# Altium PCB Push_counter.PcbDoc
Units mm, origin at the board's own origin, x right, y up, seen from the top; angles counter-clockwise.
Board outline 140 x 75 mm, 2 copper layers (Top Layer, Bottom Layer); 64 components, 50 nets, 229 pads, 103 vias.
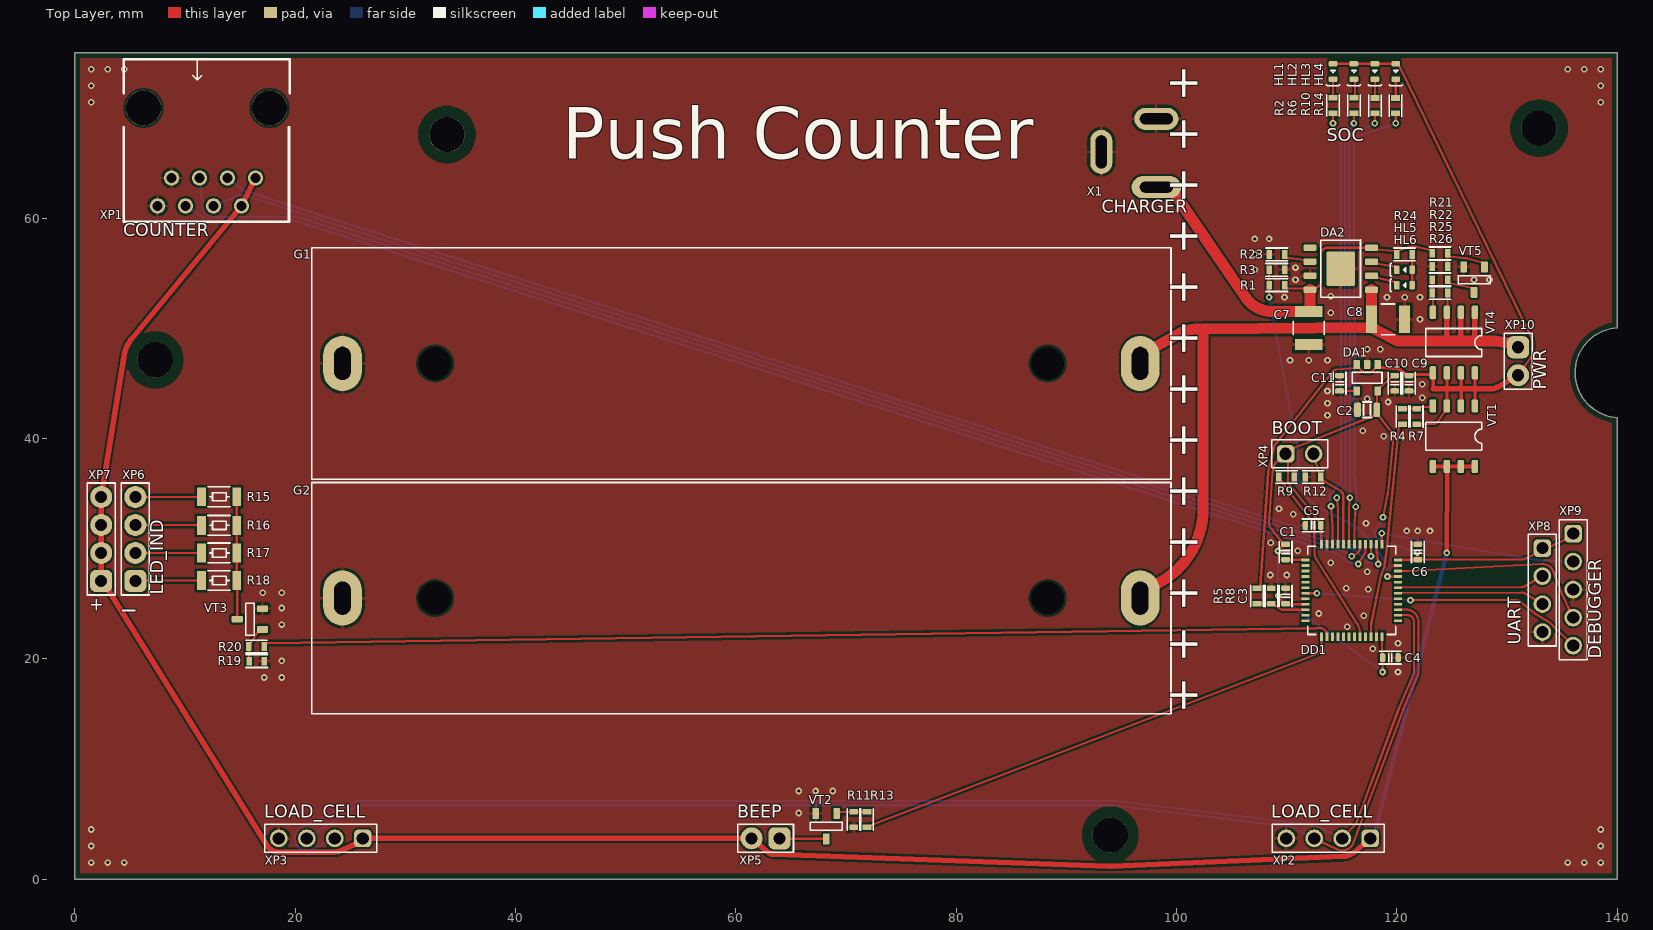
[diagram p0: Top Layer view]
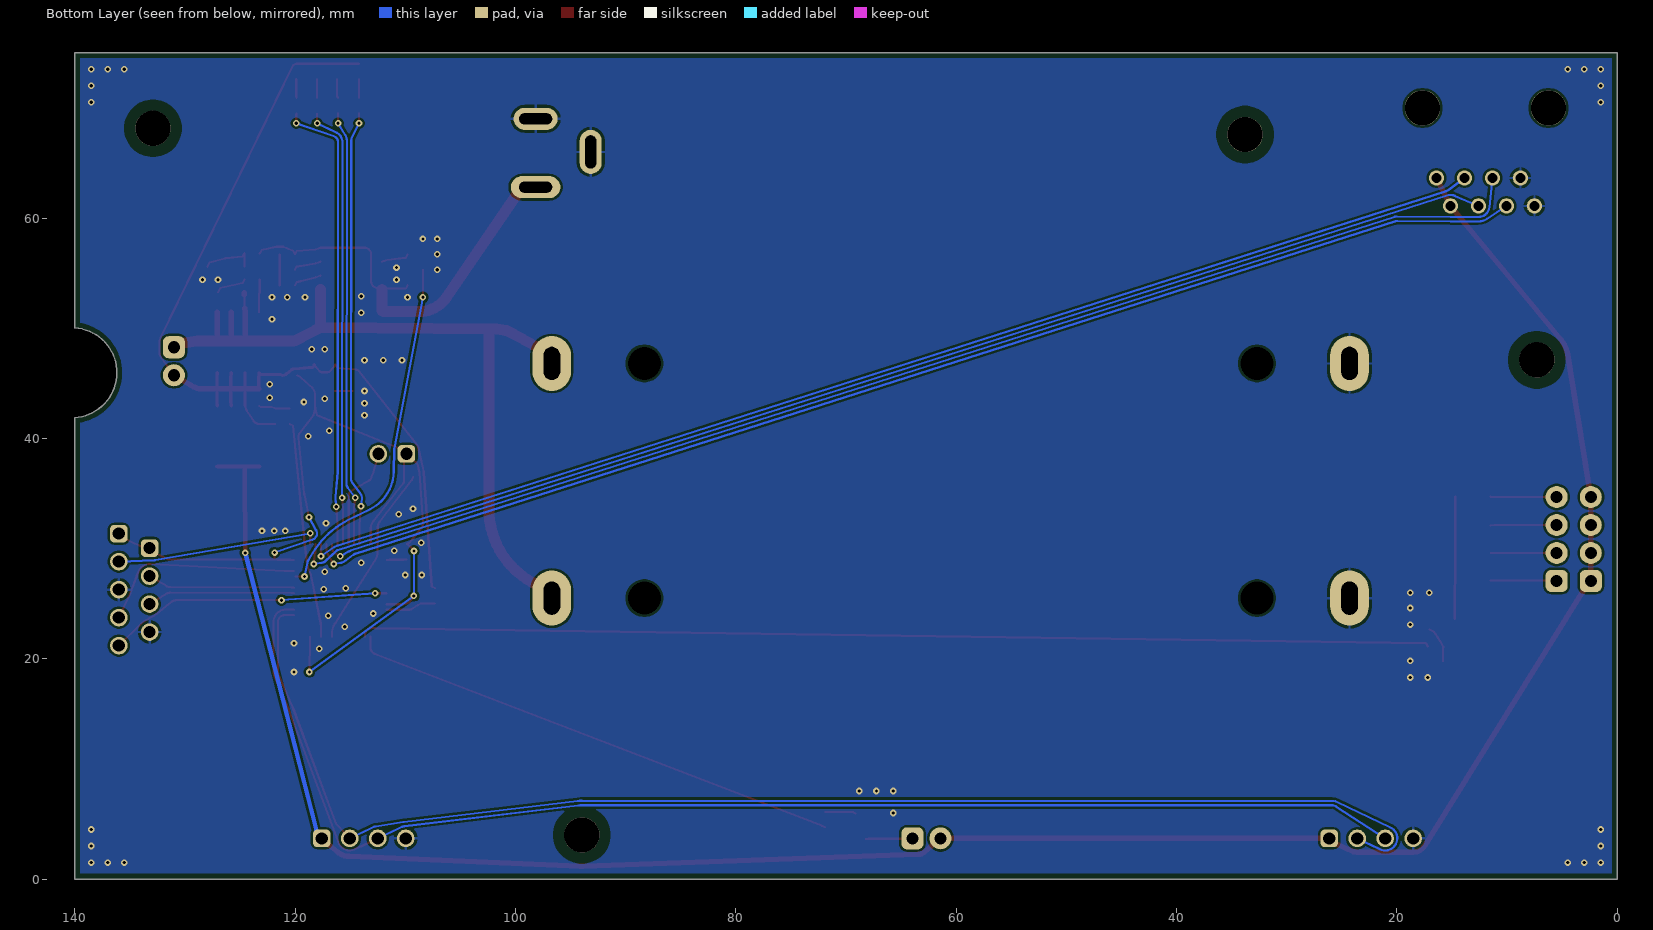
[diagram p1: Bottom Layer view, seen from below]

## Layer stack, top to bottom
Top Solder: solder mask 0.0102, Solder Resist, Dk 3.5
Top Layer: signal copper 0.0356
Dielectric 1: dielectric 0.32, FR-4, Dk 4.8
Bottom Layer: signal copper 0.0356
Bottom Solder: solder mask 0.0102, Solder Resist, Dk 3.5

## Board outline
0,0 140,0 140,41.881 cw(c140.362,46.323) 139.032,42.069 cw(c140.249,45.959) 138.973,49.831 cw(c140.371,45.59) 140,50.04 140,75 0,75

## Design rules (kind name [scope] priority, off if disabled: settings)
AssemblyTestpoint [All] p1: testpointundercomponent=TRUE minsize=1.016 maxsize=2.54 preferedsize=1.524 minholesize=0 maxholesize=1.016 preferedholesize=0.813 testpointgrid=0.025 usegrid=TRUE gridoriginx=0 gridoriginy=-75 gridtolerance=0 allowsidetop=TRUE allowsidebottom=TRUE
BoardOutlineClearance [All] p1: gap=0.5 ignorepadtopadclearanceinfootprint=FALSE
Clearance Clearance_1 [(ObjectKind = 'Pad') And (Name = 'Free-MH')] p1: gap=1 ignorepadtopadclearanceinfootprint=FALSE
Clearance [All] p2: gap=0.2 ignorepadtopadclearanceinfootprint=FALSE
FabricationTestpoint [All] p1: side=3 testpointundercomponent=TRUE minsize=1.016 maxsize=2.54 preferedsize=1.524 minholesize=0 maxholesize=1.016 preferedholesize=0.813 testpointgrid=0.025 allowsidetop=TRUE allowsidebottom=TRUE usegrid=TRUE gridoriginx=0 gridoriginy=-75 gridtolerance=0
PolygonConnect PolygonConnect_1 [IsVia] p1: connectstyle=Direct reliefconductorwidth=0.254 reliefentries=4 polygonreliefangle="90 Angle" airgapwidth=0.254
PolygonConnect [All] p2: connectstyle=Relief reliefconductorwidth=0.254 reliefentries=4 polygonreliefangle="90 Angle" airgapwidth=0.254
RoutingVias [All] p1: holewidth=0.3 width=0.6 viastyle="Through Hole" minholewidth=0.3 minwidth=0.6 maxholewidth=0.3 maxwidth=0.6
SolderMaskExpansion SolderMaskExpansion_1 [IsVia] p1: expansion=0.1 istentingtop=TRUE
SolderMaskExpansion [All] p2: expansion=0.102 istentingtop=FALSE
Width [All] p1: maxlimit=1.5 minlimit=0.2 preferedwidth=0.254 minimp=50.000000 maximp=50.000000 favimp=50.000000
27 further rules are at their usual default settings.

## Components (designator, comment, footprint, x,y, rotation, side; value= is the part's Value field where it differs from the comment)
C1 "0,1uF" C0603C 109.9,29.7 r270 top value=0,1
C2 "4.7uF" C0805C 117.3,42.6 r180 top value=4,7
C3 "0,1uF" C0603C 109.9,25.7 r90 top value=0,1
C4 "0,1uF" C0603C 119.4,20.1 r0 top value=0,1
C5 "0,1uF" C0603C 112.4,32.1 r180 top value=0,1
C6 "0,1uF" C0603C 121.9,29.7 r90 top value=0,1
C7 "10uF" C1210C 112,50 r90 top value=10
C8 "10uF" C1210C 119.2,50.8 r180 top value=10
C9 "1.0uF" C0603C 121.1,45 r270 top value=1,0
C10 "1.0uF" C0603C 119.8,45 r270 top value=1,0
C11 "0,01uF" C0603C 114.8,45 r90 top value=0,01
DA1 "LD3985M33R" SOT23-5 117.3,45.5 r270 top
DA2 "TP4056" SO-8-EP 114.9,55.4 r0 top
DD1 "STM32F103C8T6" LQFP48 115.9,26.2 r0 top
G1 "KLS5-18650-L" KLS5-18650-L 60.5,46.8 r0 top
G2 "KLS5-18650-L" KLS5-18650-L 60.5,25.5 r0 top
HL1 "FYLS-0603URC" LED0603 114.2,73.3 r270 top
HL2 "FYLS-0603URC" LED0603 116.1,73.3 r270 top
HL3 "FYLS-0603URC" LED0603 118,73.3 r270 top
HL4 "FYLS-0603URC" LED0603 119.9,73.3 r270 top
HL5 "FYLS-0603UGC" LED0603 120.7,55.3 r180 top
HL6 "FYLS-0603UGC" LED0603 120.7,53.9 r180 top
R1 "6,04k" C0603R 109.1,53.9 r180 top
R2 "1k" C0603R 114.197,70.212 r270 top
R3 "10k" C0603R 109.1,55.3 r180 top
R4 "100R" C0603R 120.5,42 r90 top
R5 "4,02k" C0603R 107.3,25.7 r270 top
R6 "1k" C0603R 116.107,70.211 r270 top
R7 "10k" C0603R 121.8,42 r90 top
R8 "10k" C0603R 108.6,25.7 r270 top
R9 "10k" C0603R 109.97,36.5 r180 top
R10 "1k" C0603R 118.01,70.192 r270 top
R11 "10k" C0603R 70.7,5.4 r90 top
R12 "10k" C0603R 112.37,36.5 r0 top
R13 "100R" C0603R 71.9,5.4 r90 top
R14 "1k" C0603R 119.875,70.192 r270 top
R15 "36R" C1206R 13.1,34.7 r180 top
R16 "36R" C1206R 13.1,32.1 r180 top
R17 "36R" C1206R 13.1,29.6 r180 top
R18 "36R" C1206R 13.1,27.1 r180 top
R19 "10k" C0603R 16.519,19.774 r180 top
R20 "100R" C0603R 16.5,21.1 r180 top
R21 "100R" C0603R 123.9,56.8 r0 top
R22 "10k" C0603R 123.9,55.6 r180 top
R23 "1,2k" C0603R 109.1,56.7 r180 top
R24 "2k" C0603R 120.7,56.7 r0 top
R25 "100R" C0603R 123.9,54.4 r0 top
R26 "10k" C0603R 123.9,53.2 r180 top
VT1 "IRF7240TRPBF" SO-8-SINGLE-FET 125.2,40.2 r270 top
VT2 "AO3400A" SOT23-3-FET 68.2,4.8 r270 top
VT3 "AO3400A" SOT23-3-FET 15.9,23.6 r180 top
VT4 "IRF7240TRPBF" SO-8-SINGLE-FET 125.2,48.7 r270 top
VT5 "AO3400A" SOT23-3-FET 127,54.4 r270 top
X1 "KLD-0202" KLD-0202 98.171,76.499 r270 top
XP1 "54602-908LF" 54602-908LF 13.656,73.494 r0 top locked
XP2 "PLS-4" PLS-4#1 113.77,3.7 r180 top
XP3 "PLS-4" PLS-4#1 22.33,3.7 r180 top
XP4 "PLS-2" PLS-2#1 111.17,38.6 r0 top
XP5 "PLS-2" PLS-2#2 62.7,3.7 r180 top
XP6 "PLS-4" PLS-4#2 5.5,30.87 r90 top
XP7 "PLS-4" PLS-4#2 2.4,30.87 r90 top
XP8 "PLS-4" PLS-4#1 133.2,26.23 r270 top
XP9 "PLS-5" PLS-5 136,26.27 r270 top
XP10 "PLS-2" PLS-2#2 131,47 r270 top

## Footprints (in the part's own frame and the unit in brackets; to place one, negate y for a bottom-side part, rotate by r counter-clockwise, add the part's x,y. Pads: shape width x height; smd on the part's side, far side on the other; paste and mask are expansions set on the pad)
54602-908LF [mm]
  round 1.4 hole 0.9: 1(2.75,-9.86) 2(1.48,-12.4) 3(0.21,-9.86) 4(-1.06,-12.4) 5(-2.33,-9.86) 6(-3.6,-12.4) 7(-4.87,-9.86) 8(-6.14,-12.4)
  round 3.2 hole 3.2 unplated: 15(-7.41,-3.51) 15(4.02,-3.51)
  silkscreen extent -9.2,-13.84 5.85,0.92
C0603C [mm]
  rrect50% 0.5x0.8 smd: 1(-0.7,0) 2(0.7,0)
  silkscreen extent -0.97,-0.58 0.97,0.58, body extent -0.8,-0.4 0.8,0.4, height 0.5
C0603R [mm]
  rect 0.5x0.8 smd: 1(-0.7,0) 2(0.7,0)
  silkscreen extent -0.97,-0.58 0.97,0.58, body extent -0.7,-0.41 0.7,0.41, height 0.45
C0805C [mm]
  rrect50% 0.6x1.3 smd: 1(-0.875,0) 2(0.875,0)
  silkscreen extent -0.4,-0.7 0.4,0.7, body extent -1,-0.6 1,0.6, height 0.8
C1206R [mm]
  rect 0.8x1.7 smd: 1(-1.6,0) 2(1.6,0)
  silkscreen extent -1,-0.9 1,0.9, body extent -1.7,-0.8 1.7,0.8, height 0.8
C1210C [mm] "Chip Capacitor, 2-Leads, Body 3,2x2,5mm, IPC Medium Density"
  rect 1x2.5 smd: 1(1.5,0) 2(-1.5,0)
  silkscreen extent -0.6,-1.4 0.6,1.4, body extent -2,-1.3 2,1.3, height 1.6
KLD-0202 [mm] "DC Power Jack, 2.5mm, KLD Series, PCB Mount"
  oval 2x4.5 hole 1 slot 3 at 90 deg: 1(13.7,0)
  oval 2x4 hole 1 slot 3 at 90 deg: 2(7.5,0)
  oval 4x2 hole 1 slot 3 at 0 deg: 3(10.5,-5)
  body extent 0.19,-4.92 14.82,4.48, height 11
KLS5-18650-L [mm]
  oval 3.5x5 hole 3 slot 1.5 at 0 deg: 1(-36.2,0) 2(36.2,0)
  round 0 hole 3 unplated: TH(-27.8,0) TH(27.8,0)
  silkscreen extent -39,-10.5 39,10.5, body extent -38.83,-10.4 38.82,10.4, height 21.65
LED0603 [mm]
  rrect50% 0.5x0.8 smd: 1(-0.7,0) 2(0.7,0)
  Top Layer pour cut-out: -0.456,0.5 0.45,0.5 0.45,-0.5 -0.456,-0.5
  silkscreen extent -0.1,-0.6 1.3,0.6, body extent -0.8,-0.4 0.8,0.4, height 0.8
LQFP48 [mm]
  rect 0.75x0.254 smd: 1(-4.2,2.75) 2(-4.2,2.25) 3(-4.2,1.75) 4(-4.2,1.25) 5(-4.2,0.75) 6(-4.2,0.25) 7(-4.2,-0.25) 8(-4.2,-0.75) 9(-4.2,-1.25) 10(-4.2,-1.75) 11(-4.2,-2.25) 12(-4.2,-2.75) 25(4.2,-2.75) 26(4.2,-2.25) 27(4.2,-1.75) 28(4.2,-1.25) 29(4.2,-0.75) 30(4.2,-0.25) 31(4.2,0.25) 32(4.2,0.75) 33(4.2,1.25) 34(4.2,1.75) 35(4.2,2.25) 36(4.2,2.75)
  rect 0.254x0.75 smd: 13(-2.75,-4.2) 14(-2.25,-4.2) 15(-1.75,-4.2) 16(-1.25,-4.2) 17(-0.75,-4.2) 18(-0.25,-4.2) 19(0.25,-4.2) 20(0.75,-4.2) 21(1.25,-4.2) 22(1.75,-4.2) 23(2.25,-4.2) 24(2.75,-4.2) 37(2.75,4.2) 38(2.25,4.2) 39(1.75,4.2) 40(1.25,4.2) 41(0.75,4.2) 42(0.25,4.2) 43(-0.25,4.2) 44(-0.75,4.2) 45(-1.25,4.2) 46(-1.75,4.2) 47(-2.25,4.2) 48(-2.75,4.2)
  silkscreen extent -4,-4 4,4, body extent -4.5,-4.51 4.5,4.49, height 1.56
PLS-2#1 [mm]
  rrect50% 1.6x1.6 hole 1.1: 1(-1.27,0)
  round 1.6 hole 1.1: 2(1.27,0)
  silkscreen extent -2.54,-1.27 2.54,1.27, body extent -2.54,-1.27 2.54,1.27, height 8.5
PLS-2#2 [mm]
  rrect50% 2x2 hole 1.1: 1(-1.27,0)
  round 2 hole 1.1: 2(1.27,0)
  silkscreen extent -2.54,-1.27 2.54,1.27, body extent -2.54,-1.27 2.54,1.27, height 8.5
PLS-4#1 [mm]
  rrect50% 1.6x1.6 hole 1.1: 1(-3.81,0)
  round 1.6 hole 1.1: 2(-1.27,0) 3(1.27,0) 4(3.81,0)
  silkscreen extent -5.08,-1.27 5.08,1.27, body extent -5.08,-1.27 5.08,1.27, height 8.5
PLS-4#2 [mm]
  rrect50% 2x2 hole 1.1: 1(-3.81,0)
  round 2 hole 1.1: 2(-1.27,0) 3(1.27,0) 4(3.81,0)
  silkscreen extent -5.08,-1.27 5.08,1.27, body extent -5.08,-1.27 5.08,1.27, height 8.5
PLS-5 [mm]
  rrect50% 1.6x1.6 hole 1.1: 1(-5.08,0)
  round 1.6 hole 1.1: 2(-2.54,0) 3(0,0) 4(2.54,0) 5(5.08,0)
  silkscreen extent -6.35,-1.27 6.35,1.27, body extent -6.35,-1.27 6.35,1.27, height 8.5
SO-8-EP [mm]
  rrect50% 1.2x0.6 smd: 1(-2.794,1.905) 2(-2.794,0.635) 3(-2.794,-0.635) 4(-2.794,-1.905) 5(2.794,-1.905) 6(2.794,-0.635) 7(2.794,0.635) 8(2.794,1.905)
  rrect10% 2.6x3.1 smd: EP(0,0)
  silkscreen extent -1.8,-2.6 1.8,2.6, body extent -3.07,-2.44 3.07,2.45, height 1.76
SO-8-SINGLE-FET [mm]
  rrect50% 1.2x0.6 smd: D(2.75,1.878) D(2.75,-0.662) D(2.75,0.608) D(2.75,-1.932) G(-2.75,-1.932) S(-2.75,1.878) S(-2.75,-0.662) S(-2.75,0.608)
  silkscreen extent -1.27,-2.57 1.27,2.51, body extent -3.07,-2.47 3.07,2.42, height 1.76
SOT23-3-FET [mm] "SOT23, 3 pin"
  rrect25% 1x0.6 smd: D(1.15,0) G(-1.15,0.95) S(-1.15,-0.95)
  silkscreen extent -0.38,-1.45 0.38,1.45, body extent -1.4,-1.45 1.4,1.45, height 1.29
SOT23-5 [mm]
  rrect25% 0.8x0.6 smd: 1(-1.2,0.95) 2(-1.2,0) 3(-1.2,-0.95) 4(1.2,-0.95) 5(1.2,0.95)
  silkscreen extent -0.51,-1.35 0.51,1.35, body extent -1.4,-1.45 1.4,1.45, height 1.44

## Part data
C1 C3 C4 C5 C6: library part C0603C104K5RACAUTO, "C0603C104K5RACAUTO, 0603 X7R  0,1 uF 50V", Dielectric=X7R, Manufacturer=KEMET, Package="SMD 0603", Tolerance=±10%, Voltage=50V, Component Note="0603 0,1uF ±10% 50V X7R", ComponentLink1Description=Datasheet, Part Number=C0603C104K5RACAUTO, Tmax=125, Tmin=-55, Units=uF
C2: library part CL21B475KOFNFNE, "CL21B475KOFNFNE, 0805 X7R 4,7 uF 16V", Dielectric=X7R, Manufacturer=Samsung, Package="SMD 0805", Tolerance=±10%, Voltage=16V, Component Note="0805 4,7uF ±10% 16V X7R", ComponentLink1Description=Datasheet, ComponentLink1URL=https://media.digikey.com/pdf/Data%20Sheets/Samsung%20PDFs/CL_Series_MLCC_ds.pdf, Part Number=CL21B475KOFNFNE, Tmax=125, Tmin=-55, Units=uF
C7 C8: library part C3225X7R1H106M250AC, "C3225X7R1H106M250AC, 1210 X7R 10 uF 50V", Dielectric=X7R, Manufacturer=TDK, Package="SMD 1210", Tolerance=±20%, Voltage=50V, Component Note="1210 10uF ±20% 50V X7R", ComponentLink1Description=Datasheet, ComponentLink1URL=https://ru.mouser.com/datasheet/2/400/lcc_commercial_general_en-837201.pdf, Part Number=C3225X7R1H106M250AC, Tmax=125, Tmin=-55, Units=uF
C9 C10: library part CL10B105KA8NNNC, "CL10B105KA8NNNC, 0603 X7R 1,0 uF 25V", Dielectric=X7R, Manufacturer=Samsung, Package="SMD 0603", Tolerance=±10%, Voltage=25V, Component Note="0603 1,0uF ±10% 25V X7R", ComponentLink1Description=Datasheet, ComponentLink1URL=https://media.digikey.com/pdf/Data%20Sheets/Samsung%20PDFs/CL_Series_MLCC_ds.pdf, Part Number=CL10B105KA8NNNC, Tmax=125, Tmin=-55, Units=uF
C11: library part CL10B103KC8NNNC, "CL10B103KC8NNNC, 0603 X7R 0,01 uF 100V", Dielectric=X7R, Manufacturer=Samsung, Package="SMD 0603", Tolerance=±10%, Voltage=100V, Component Note="0603 0,01uF ±10% 100V X7R", ComponentLink1Description=Datasheet, Part Number=CL10B103KC8NNNC, Tmax=125, Tmin=-55, Units=uF
DA1: "Linear Voltage Regulator", Manufacturer="Microchip Technology", Package=SOT23-5, BOM="DC/DC 5,5-6V, 3,3V,", ComponentLink1Description=Datasheet, ComponentLink1URL=https://www.electronshik.ru/pdf/l/ld3985.pdf, Iout=0,5, Part Number=LD3985M33R, Tmax=125, Tmin=-40, TypeConvert=DC/DC, Vin=5,5, VinMax=6, Vout=3,3
DA2: Manufacturer=UMW, Package=SO-8-EP, BOM="SLLBC 5-8V, V,", ComponentLink1Description=Datasheet, ComponentLink1URL=https://static.chipdip.ru/lib/848/DOC018848830.pdf, Iout=1, Part Number=TP4056, Tmax=125, Tmin=-40, TypeConvert=SLLBC, Vin=5, VinMax=8
DD1: "STM32F103C8T6, 64 KB Flash, 20 KB RAM, LQFP48", FREQ=72, Manufacturer=STMicroelectronics, Package=LQFP48, CAN=1, Component Note=LQFP48, ComponentLink1Description=Datasheet, Core="ARM Cortex-M3", CPU Speed="1.25 DMIPS/MHz", EEPROM=-, ETH=-, FLASH="64 KB", Part Number=STM32F103C8T6, RAM="20 KB", Tmax=125, Tmin=-40
G1 G2: "KLS5-18650-L, , BAT", ComponentLink1Description=Datasheet, Part Number=KLS5-18650-L, System=Connector, Type=BAT
HL1 HL2 HL3 HL4: "SMD 0603 Red 30mA 80mcd", Color=Red, Current=30mA, Manufacturer=Foryard, Package="SMD 0603", Voltage=2.1V, Alternative="LTST-C191KRKT Lite-On Inc", Component Note="0603, Red", ComponentLink1Description=Datasheet, ComponentLink1URL=https://sds.compel.ru/item-pdf/af7b1cc2bbe1d373f48bd8c95fbe7607/pn/foryard~fyls-0603urc.pdf, Luminous intensity=80mcd, Part Number=FYLS-0603URC
HL5 HL6: "SMD 0603 Green 30mA 65mcd", Color=Green, Current=30mA, Manufacturer=Foryard, Package="SMD 0603", Voltage=2V, Alternative="LTST-C191KGKT Lite-On Inc", Component Note="0603, Green", ComponentLink1Description=Datasheet, ComponentLink1URL=https://sds.compel.ru/item-pdf/bfcdb1ef531cd95dc93bcbdb85ab35c3/pn/foryard~fyls-0603ugc.pdf, Luminous intensity=65mcd, Part Number=FYLS-0603UGC
R1: library part RC0603FR-076K04L, "RC0603FR-076K04L, 1% 6,04k", Manufacturer=Yageo, Package="SMD 0603", Power=0,1, Tolerance=1%, Voltage=75, Component Note="0603 6,04k 1%", Part Number=RC0603FR-076K04L, ppm=100
R2 R6 R10 R14: library part RC0603JR-071KL, "RC0603JR-071KL, 5% 1k", Manufacturer=Yageo, Package="SMD 0603", Power=0,1, Tolerance=5%, Voltage=75, Component Note="0603 1k 5%", Part Number=RC0603JR-071KL, ppm=100
R3 R8: library part RC0603FR-0710KL, "RC0603FR-0710KL, 1% 10k", Manufacturer=Yageo, Package="SMD 0603", Power=0,1, Tolerance=1%, Voltage=75, Component Note="0603 10k 1%", Part Number=RC0603FR-0710KL, ppm=100
R4 R13 R20 R21 R25: library part RC0603FR-07100RL, "RC0603FR-07100RL, 1% 100R", Manufacturer=Yageo, Package="SMD 0603", Power=0,1, Tolerance=1%, Voltage=75, Component Note="0603 100R 1%", Part Number=RC0603FR-07100RL, ppm=100
R5: library part RC0603FR-074K02L, "RC0603FR-074K02L, 1% 4,02k", Manufacturer=Yageo, Package="SMD 0603", Power=0,1, Tolerance=1%, Voltage=75, Component Note="0603 4,02k 1%", Part Number=RC0603FR-074K02L, ppm=100
R7 R9 R11 R12 R19 R22 R26: library part RC0603JR-0710KL, "RC0603JR-0710KL, 5% 10k", Manufacturer=Yageo, Package="SMD 0603", Power=0,1, Tolerance=5%, Voltage=75, Component Note="0603 10k 5%", Part Number=RC0603JR-0710KL, ppm=100
R15 R16 R17 R18: library part RC1206JR-0736RL, "RC1206JR-0736RL, 5% 36R", Manufacturer=Yageo, Package="SMD 1206", Power=0,125, Tolerance=5%, Voltage=150, Component Note="1206 36R 5%", Part Number=RC1206JR-0736RL, ppm=100
R23: library part RC0603JR-071K2L, "RC0603JR-071K2L, 5% 1,2k", Manufacturer=Yageo, Package="SMD 0603", Power=0,1, Tolerance=5%, Voltage=75, Component Note="0603 1,2k 5%", Part Number=RC0603JR-071K2L, ppm=100
R24: library part RC0603JR-072KL, "RC0603JR-072KL, 5% 2k", Manufacturer=Yageo, Package="SMD 0603", Power=0,1, Tolerance=5%, Voltage=75, Component Note="0603 2k 5%", Part Number=RC0603JR-072KL, ppm=100
VT1 VT4: "IRF7240TRPBF, SO-8 A V", Manufacturer=Infineon, Package=SO-8, Component Note="SO-8, P, V, A", ComponentLink1Description=Datasheet, ComponentLink1URL=https://static.chipdip.ru/lib/404/DOC016404580.pdf, Part Number=IRF7240TRPBF, Type=P
VT2 VT3 VT5: "AO3400A, SOT23-3 5A 30V", Manufacturer=UMW, Package=SOT23-3, Component Note="SOT23-3, N, 30V, 5A", ComponentLink1Description=Datasheet, ComponentLink1URL=https://static.chipdip.ru/lib/975/DOC014975392.pdf, I Drain=5, Input Cap=1050, P=1W, Part Number=AO3400A, Qg=12, RDS=0,033, Type=N, U Drain-Source=30, U Gate max=12, U Gate th=1,4
X1: "KLD-0202, Kycon,", Manufacturer=Kycon, ComponentLink1Description=Datasheet, Part Number=KLD-0202, System=Connector
XP1: "54602-908LF, , ETH", ComponentLink1Description=Datasheet, Part Number=54602-908LF, System=Connector, Type=ETH
XP2 XP3 XP6 XP7 XP8: "PLS-4, , PLS 4 Pins", ComponentLink1Description=Datasheet, Part Number=PLS-4, Pins=4, System=Connector, Type=PLS
XP4 XP5 XP10: "PLS-2, , PLS 2 Pins", ComponentLink1Description=Datasheet, Part Number=PLS-2, Pins=2, System=Connector, Type=PLS
XP9: "PLS-5, , PLS 5 Pins", ComponentLink1Description=Datasheet, Part Number=PLS-5, Pins=5, System=Connector, Type=PLS

## Free pads (board coordinates)
  round 3.2 hole 3.2 unplated: MH(7.303,47.124) MH(33.782,67.57) MH(93.98,4.007) MH(132.905,68.142)

## Via types
v1: diameter 0.6, hole 0.3, Top Layer to Bottom Layer, tented both sides, 103 vias

## Nets (pads, with @x,y where several pads share a name; then routed paths per layer and width w, separated by ;. In a path a pad name is that pad's centre, name@x,y a point inside that pad or via, vN(x,y) a via of type N, cw(c..) or ccw(c..) an arc to the next point about the centre after c; other vN are vias at no path point)
3V3: C1.1 C2.1 C3.1 C4.1 C5.1 C6.1 C10.1 DA1.5 DD1.9 DD1.24 DD1.36 DD1.48 XP4.1 XP8.1 XP9.1 | length 88
  Top Layer w0.2: v1(109.213,29.782) 109.539,30.171 cw(c109.999,29.786) 109.75,30.332 C1.1 109.625,30.525 108.53,31.897 108.529,31.898 cw(c108.999,32.271) 108.401,32.314 108.721,36.92 cw(c109.02,36.9) 108.728,36.967 108.851,37.505 108.851,37.507 cw(c109.436,37.372) 109.055,37.836 109.5,38.2 XP4.1 ; v1(109.218,25.7) 109.625,25.125 C3.1 110.175,24.949 111.425,24.949 DD1.9 ; DD1.48 113.142,30.675 113.142,31.825 C5.1 112.975,32.375 110.184,35.914 cw(c110.42,36.1) 110.12,36.1 110.12,38.2 XP4.1 ; DD1.24 118.657,21.725 118.657,20.375 C4.1 v1(118.7,18.8) ; v1(118.737,32.841) 119.156,34.911 cw(c119.745,34.794) 119.165,34.947 119.165,34.949 ccw(c118.585,35.104) 119.182,35.044 119.689,40.07 ccw(c119.092,40.131) 119.567,40.497 119.566,40.498 118.325,42.1 C2.1 ; C10.1 119.525,45.575 118.45,44.6 DA1.5 118.197,44 118.197,43.1 C2.1 ; DD1.36 120.375,28.977 121.625,28.977 C6.1 ; v1(121.864,29.633) 121.871,29.499 cw(c121.272,29.462) 121.872,29.462 121.872,29.125 C6.1 ; XP9.1 135.6,30.95 133.288,29.854 131.61,29.058 cw(c131.353,29.6) 131.353,29 122.175,29 C6.1 ; XP4.1 110.3,39 118.025,42.1 C2.1
  Bottom Layer w0.2: v1(109.213,29.782) v1(109.218,25.7) v1(118.7,18.8) ; 118.369,30.829 cw(c118.612,31.378) 118.087,31.669 v1(118.737,32.841) ; 118.37,30.829 118.383,30.823 ; 118.383,30.823 ccw(c118.626,31.372) 118.432,30.804 v1(121.864,29.633)
5V: C7.1 DA2.4 DA2.8 R1.1 R21.1 R24.1 X1.1 | length 38.9
  Top Layer w0.2: R1.1 109.95,53.6 111.656,53.6 DA2.4 DA2.4@112.556,53.645 ; DA2.4@112.56,53.645 DA2.4@112.556,53.645 ; R21.1 123.05,57.1 121.714,57.393 ccw(c121.65,57.1) 121.651,57.4 121.15,57.4 ccw(c121.15,57.1) 121.032,57.376 120.15,57 R24.1 119.85,57 118.144,57.155 DA2.8 117.244,57.301 113.7,57.301 ccw(c113.7,56.701) 113.1,56.701 113.1,54.242 cw(c112.5,54.242) 112.562,53.646 DA2.4@112.556,53.645
  Top Layer w1: X1.1 99.421,62.799 106.257,52.806 ccw(c108.733,54.5) 108.733,51.5 C7.1 ; DA2.4 C7.1@112.106,51.562
BAT_MEAS: DD1.10 R5.2 R8.2 | length 4.5
  Top Layer w0.2: R5.2 108.3,25 R8.2 108.9,24.85 109.388,24.522 ccw(c109.625,24.875) 109.625,24.45 111.425,24.45 DD1.10
BEEP_CTRL: DD1.13 R13.1 | length 45.5
  Top Layer w0.2: R13.1 72.2,4.85 112.765,20.443 ccw(c112.55,21.003) 113.15,21.026 113.15,21.725 DD1.13
BOOT0: DD1.44 R12.2 XP4.2 | length 9.4
  Top Layer w0.2: XP4.2 112.92,36.8 R12.2 113.22,36.2 114.835,35.272 cw(c114.536,34.752) 115.136,34.752 115.136,30.675 DD1.44
BOOT1: DD1.20 R9.2 | length 16.7
  Top Layer w0.2: R9.2 109.42,36.2 112.369,32.383 ; 112.369,32.382 cw(c111.894,32.016) 112.494,32.025 112.524,29.9 112.524,29.632 ccw(c113.928,29.632) 112.529,29.508 ccw(c113.928,29.632) 112.606,29.159 112.935,28.64 113.932,27.066 114.014,26.935 116.39,23.184 cw(c115.883,22.863) 116.392,23.18 cw(c114.973,22.279) 116.654,22.269 DD1.20
CHG_DET: DD1.33 R1.2 R3.2 | length 32.6
  Top Layer w0.2: v1(108.4,52.8) 108.4,53.6 R1.2 R3.2 ; v1(119.15,27.462) 119.825,27.462 DD1.33@119.947,27.45
  Bottom Layer w0.2: v1(108.4,52.8) 110.988,39.13 cw(c110.3,39) 111,39.015 111.045,36.959 ccw(c114.922,37.042) 113.213,33.561 115.11,32.628 cw(c111.631,25.546) 118.398,29.603 118.815,28.909 cw(c118.3,28.6) 118.849,28.841 cw(c118.3,28.6) 118.887,28.722 v1(119.15,27.462)
CHG_LVL_1: DD1.42 R14.2 | length 41.7
  Top Layer w0.2: DD1.42 116.147,30.675 116.147,32.101 cw(c116.747,32.101) 116.148,32.143 v1(116.264,33.794) ; R14.2 119.9,69.342 v1(119.9,68.6)
  Bottom Layer w0.2: v1(116.264,33.794) 116.333,34.545 ccw(c115.736,34.6) 116.334,34.65 116.133,36.984 116.1,66.5 116.1,66.871 116.1,66.873 cw(c116.7,66.871) 116.506,67.439 v1(119.9,68.6)
CHG_LVL_2: DD1.43 R10.2 | length 40.4
  Top Layer w0.2: DD1.43 115.649,30.675 115.649,33.636 cw(c116.249,33.636) 115.652,33.692 v1(115.736,34.6) ; v1(118,68.6) 118,69.342 R10.2
  Bottom Layer w0.2: v1(115.736,34.6) 115.7,66.5 115.7,67.009 115.738,67.143 cw(c116.7,66.871) 115.864,67.42 cw(c116.7,66.871) 115.87,67.429 cw(c116.7,66.871) 116.159,67.712 cw(c116.7,66.871) 116.269,67.773 v1(118,68.6)
CHG_LVL_3: DD1.45 R6.2 | length 39.6
  Top Layer w0.2: v1(114.536,34.6) 114.641,33.665 cw(c114.045,33.598) 114.645,33.598 114.645,30.675 DD1.45 ; v1(116.1,68.6) 116.1,69.361 R6.2
  Bottom Layer w0.2: v1(114.536,34.6) 115.218,35.524 ccw(c114.735,35.879) 115.335,35.878 115.3,66.5 115.3,67.008 cw(c116.3,67.007) 115.446,67.528 v1(116.1,68.6)
CHG_LVL_4: DD1.46 R2.2 | length 39.6
  Top Layer w0.2: v1(114.018,33.833) 114.146,32.095 cw(c113.548,32.051) 114.148,32.051 114.148,30.675 DD1.46 ; R2.2 114.2,69.362 v1(114.2,68.6)
  Bottom Layer w0.2: v1(114.018,33.833) 113.94,34.533 cw(c114.536,34.6) 113.937,34.566 cw(c114.536,34.6) 114.052,34.954 114.819,36.003 ccw(c114.334,36.356) 114.934,36.355 114.9,66.5 114.9,67.058 ccw(c114.3,67.058) 114.837,67.327 v1(114.2,68.6)
GND: C2.2 C3.2 C4.2 C5.2 C6.2 C7.2 C8.2 C9.2 C10.2 C11.2 DA1.2 DA2.3 DA2.EP DD1.8 DD1.23 DD1.35 DD1.47 G1.1 G2.1 R3.1 R8.1 R9.1 R11.1 R12.1 R19.1 R22.2 R23.2 VT2.S VT3.S VT5.S X1.2 X1.3 XP1.7 XP1.8 XP2.4 XP3.4 XP8.4 XP9.3
  other v1: 1.5,1.5 3,1.5 4.5,1.5 135.5,1.5 137,1.5 138.5,1.5 1.5,3 138.5,3 1.5,4.5 138.5,4.5 65.7,6 65.7,8 67.24,7.997 68.8,8 17.2,18.3 18.8,18.3 120.1,18.8 18.8,19.8 117.8,20.9 120.1,21.4 115.5,22.9 18.8,23.1 117,23.9 112.9,24.1 18.8,24.6 17.069,25.998 18.8,26 117.4,26.3 115.4,26.4 108.5,27.6 110,27.6 117.3,27.9 114,28.7 111,29.8 108.554,30.526 120.9,31.6 121.9,31.6 123,31.6 117.2,32.3 110.6,33.1 109.3,33.6 118.8,40.2 116.9,40.7 113.7,42.1 113.7,43.2 119.2,43.3 117.3,43.6 122.3,43.7 113.7,44.3 122.3,44.9 110.3,47.1 112,47.1 113.7,47.1 117.3,48.1 118.5,48.1 122.1,50.8 114,51.4 109.8,52.8 119.1,52.8 120.7,52.8 122.1,52.8 114,52.9 110.8,54.4 127,54.4 128.4,54.4 107.1,55.3 110.8,55.5 107.1,56.7 107.1,58.1 108.4,58.1 1.5,70.5 138.5,70.5 1.5,72 138.5,72 1.5,73.5 3,73.5 4.5,73.5 135.5,73.5 137,73.5 138.5,73.5
LED_CTRL: DD1.14 R20.1 | length 97.2
  Top Layer w0.2: R20.1 17.35,21.4 112.714,22.771 113.04,22.776 cw(c113.05,22.176) 113.456,22.618 113.48,22.596 cw(c113.277,22.375) 113.523,22.547 113.541,22.521 cw(c113.05,22.176) 113.65,22.176 DD1.14
NetC1_2: C1.2 DD1.1 | length 1.8
  Top Layer w0.2: C1.2 110.175,28.977 111.425,28.977 DD1.1
NetC11_1: C11.1 DA1.4 | length 1.5
  Top Layer w0.2: C11.1 DA1.4
NetDA2_2: DA2.2 R23.1 | length 2.5
  Top Layer w0.2: R23.1 109.95,56.4 111.656,56.185 DA2.2
NetDA2_6: DA2.6 HL6.2 | length 2.6
  Top Layer w0.2: DA2.6 118.144,54.615 119.875,54.175 HL6.2
NetDA2_7: DA2.7 HL5.2 | length 2.5
  Top Layer w0.2: DA2.7 118.144,55.885 119.875,55.575 HL5.2
NetHL1_2: HL1.2 R2.1 | length 1.7
  Top Layer w0.2: R2.1 114.2,71.062 114.2,72.475 HL1.2
NetHL2_2: HL2.2 R6.1 | length 1.7
  Top Layer w0.2: R6.1 116.2,71.061 116.2,72.475 HL2.2@116.2,72.6
NetHL3_2: HL3.2 R10.1 | length 1.7
  Top Layer w0.2: HL3.2 118.001,72.475 118.001,71.042 R10.1
NetHL4_2: HL4.2 R14.1 | length 1.7
  Top Layer w0.2: R14.1 119.898,71.042 119.898,72.475 HL4.2
NetHL5_1: HL5.1 HL6.1 R24.2 | length 2.8
  Top Layer w0.2: HL6.1 HL5.1 121.4,56.4 R24.2
NetR4_2: R4.2 R7.2 VT1.G | length 2.8
  Top Layer w0.2: R4.2 R7.2 122.1,42.85 123.118,42.85 VT1.G
NetR11_2: R11.2 R13.2 VT2.G | length 2.8
  Top Layer w0.2: VT2.G 69.35,6.084 71.6,6.084 R13.2
NetR15_1: R15.1 R16.1 R17.1 R18.1 VT3.D | length 11.1
  Top Layer w0.2: R15.1 R16.1 R17.1 R18.1 14.747,26.35 14.747,23.8 VT3.D
NetR15_2: R15.2 XP6.4 | length 6
  Top Layer w0.2: XP6.4 11.2,34.68 R15.2
NetR16_2: R16.2 XP6.3 | length 6
  Top Layer w0.2: XP6.3 11.2,32.14 R16.2
NetR17_2: R17.2 XP6.2 | length 6
  Top Layer w0.2: XP6.2 R17.2
NetR18_2: R18.2 XP6.1 | length 6
  Top Layer w0.2: XP6.1 5.9,27.098 11.2,27.098 R18.2
NetR19_2: R19.2 R20.2 VT3.G | length 3.4
  Top Layer w0.2: R19.2 15.804,20.074 15.804,20.8 R20.2 15.95,21.4 16.65,22.45 VT3.G
NetR21_2: R21.2 R22.1 VT5.G | length 5
  Top Layer w0.2: R22.1 R21.2 124.75,56.5 126.311,56.348 cw(c126.275,55.975) 126.376,56.336 127.75,55.95 VT5.G
NetR25_1: R25.1 R26.2 VT4.G | length 3
  Top Layer w0.2: R25.1 R26.2 cw(c123.2,53.132) 123.268,53.132 VT4.G
NetR25_2: R25.2 VT5.D | length 2.9
  Top Layer w0.2: R25.2 124.75,54.1 126.8,53.65 VT5.D
NetVT2_D: VT2.D XP5.1 | length 4.2
  Top Layer w0.2: XP5.1 64.37,3.652 68,3.652 VT2.D
NRST: DD1.7 XP9.5 | length 25.8
  Top Layer w0.2: DD1.7 111.975,25.943 v1(112.742,25.943) ; v1(121.235,25.318) 130.854,25.3 ; 130.855,25.3 cw(c130.853,24.7) 131.236,25.162 132.497,24.114 ccw(c133.2,24.96) 132.65,24.007 133.743,23.376 cw(c133.2,22.42) 133.975,23.201 XP9.5
  Bottom Layer w0.2: v1(112.742,25.943) v1(121.235,25.318)
RESET_COUNT: DD1.40 XP1.6 | length 113.8
  Top Layer w0.2: v1(116.5,28.6) 117.063,29.536 ccw(c116.55,29.846) 117.15,29.846 117.15,30.125 DD1.40
  Bottom Layer w0.2: XP1.6 11.824,59.926 ccw(c12.596,61.094) 12.596,59.694 15.142,59.694 19.952,59.733 cw(c19.955,59.133) 20.137,59.705 114.537,29.526 cw(c114.353,28.955) 114.709,29.437 115.542,28.818 ccw(c115.9,29.3) 115.808,28.707 v1(116.5,28.6)
SLEEP_CTRL: DD1.22 R4.1 | length 19.7
  Top Layer w0.2: DD1.22 117.661,22.275 117.661,23.071 cw(c118.261,23.071) 117.673,23.19 118.561,27.581 cw(c119.15,27.462) 118.589,27.677 118.86,28.386 ccw(c118.3,28.6) 118.896,28.527 119.075,29.988 ccw(c118.777,30.025) 119.075,29.995 120.2,41.15 R4.1
SPI1_MOSI: DD1.41 XP1.5 | length 113.8
  Top Layer w0.2: v1(115.9,29.3) 116.338,29.546 ccw(c116.045,30.07) 116.645,30.07 116.645,30.125 DD1.41
  Bottom Layer w0.2: XP1.5 11.601,60.99 ccw(c12.596,61.094) 12.596,60.094 15.136,60.094 ccw(c15.136,61.094) 15.144,60.094 20.011,60.134 cw(c20.016,59.534) 20.197,60.106 20.199,60.105 114.966,29.809 cw(c114.782,29.238) 115.073,29.762 v1(115.9,29.3)
SPI1_NSS: DD1.38 XP1.4 | length 113.2
  Top Layer w0.2: DD1.38 118.15,30.125 118.15,29.78 ccw(c118.75,29.78) 118.2,29.542 cw(c117.649,29.303) 118.248,29.344 v1(118.3,28.6)
  Bottom Layer w0.2: XP1.4 14.742,62.013 cw(c15.136,61.094) 15.44,62.047 116.083,29.872 cw(c115.9,29.3) 116.311,29.737 117.238,28.865 ccw(c117.649,29.303) 117.562,28.709 v1(118.3,28.6)
SPI1_SCK: DD1.39 XP1.3 | length 110.6
  Top Layer w0.2: v1(117.649,29.303) 117.649,30.125 DD1.39
  Bottom Layer w0.2: XP1.3 15.316,62.539 ccw(c15.676,63.02) 15.514,62.442 cw(c15.136,61.094) 15.564,62.427 115.532,30.467 116.205,30.253 cw(c115.9,29.3) 116.472,30.12 117.593,29.342 v1(117.649,29.303)
SPI2_MISO: DD1.27 XP2.3 XP3.3 | length 120.4
  Top Layer w0.2: XP2.3 114.564,2.709 ccw(c115.04,3.7) 116.071,3.317 120.584,15.455 121.87,18.413 ccw(c120.953,18.812) 121.953,18.809 ccw(c120.953,18.812) 121.953,18.812 121.953,23.409 ccw(c121.353,23.409) 121.95,23.463 ccw(c120.857,23.363) 120.834,24.461 120.401,24.455 cw(c120.395,25.055) 120.395,24.455 120.375,24.455 DD1.27
  Bottom Layer w0.2: XP3.3 25.55,6.603 cw(c25.877,6.1) 25.877,6.7 93.98,6.707 cw(c93.98,4.007) 94.302,6.688 110.091,4.792 cw(c109.96,3.7) 110.436,4.692 XP2.3
SPI2_SCK: DD1.26 XP2.2 XP3.2 | length 127.3
  Top Layer w0.2: XP2.2 116.189,4.918 ccw(c115.753,5.33) 116.315,5.121 120.209,15.594 cw(c120.584,15.455) 120.217,15.614 ; DD1.26 120.375,23.959 120.953,23.959 cw(c120.953,23.359) 121.553,23.361 121.553,18.812 cw(c120.953,18.812) 121.503,18.572 120.217,15.614 ; 121.503,18.572 120.217,15.614
  Bottom Layer w0.2: XP3.2 21.536,2.709 cw(c21.06,3.7) 20.588,4.694 25.448,7.003 cw(c25.877,6.1) 25.877,7.1 93.98,7.107 cw(c93.98,4.007) 94.351,7.085 110.137,5.189 cw(c109.96,3.7) 110.196,5.181 112.673,4.786 cw(c112.5,3.7) 112.976,4.692 XP2.2
SWCLK: DD1.37 XP9.2 | length 18.6
  Top Layer w0.2: v1(118.612,31.378) 118.623,30.675 DD1.37
  Bottom Layer w0.2: v1(118.612,31.378) 132.681,28.95 ccw(c132.8,29.64) 132.772,28.941 XP9.2
SWDIO: DD1.34 XP9.4 | length 19
  Top Layer w0.2: DD1.34 120.375,27.959 120.962,27.959 ccw(c120.962,28.559) 120.992,27.96 ; 120.994,27.96 133.142,28.598 cw(c133.2,27.5) 134.232,27.881 134.968,25.889 ccw(c136,26.27) 135.009,25.794 XP9.4
USART_RX: DD1.31 XP8.2 | length 13.4
  Top Layer w0.2: DD1.31 120.375,26.477 131.337,26.5 ; 131.339,26.5 ccw(c131.336,27.1) 131.64,26.582 XP8.2
USART_TX: DD1.30 XP8.3 | length 13.4
  Top Layer w0.2: DD1.30 120.375,25.977 131.33,26 ; 131.332,26 cw(c131.332,25.4) 131.645,25.911 XP8.3
VBAT: C8.1 DA2.5 G1.2 G2.2 R26.1 VT4.S XP10.1 | length 76.2
  Top Layer w0.2: VT4.S@124.588,51.8 R26.1@124.6,53.05
  Top Layer w0.5: 124.512,48.827 124.512,51.1 124.538,51.45 VT4.S@124.588,51.8 ; R26.1@124.6,53.05 R26.1 ; VT4.S@125.808,51.45 125.812,51.1 125.812,48.825 ; 127.061,48.823 127.061,51.1 VT4.S@127.078,51.45
  Top Layer w1: G2.2 96.7,26.25 96.88,26.299 ccw(c94.904,33.528) 102.398,33.531 102.398,33.536 102.392,49.915 ; G1.2 96.7,47.55 100.286,49.534 cw(c101.738,46.909) 101.708,49.909 101.712,49.909 102.392,49.915 ; DA2.5 117.7,51.55 C8.1 C8.1@117.7,50.05 ; XP10.1 130.7,48.57 128.885,48.821 128.242,48.822 127.061,48.823 125.812,48.825 124.512,48.827 123.852,48.827 120.2,48.85 cw(c120.2,49.55) 119.88,48.928 C8.1@117.7,50.05 ; 102.392,49.915 C8.1@117.7,50.05
VCC: VT1.D XP1.1 XP1.2 XP2.1 XP3.1 XP5.2 XP7.1 XP7.2 XP7.3 XP7.4 | length 209.5
  Top Layer w0.4: VT1.D@123.268,37.45 VT1.D@124.538,37.45 ; v1(124.53,29.604) 124.56,37.014 ccw(c123.36,37.019) 124.558,37.084 124.558,37.086 VT1.D@124.538,37.45 ; VT1.D@127.078,37.45 125.808,37.45 VT1.D@124.538,37.45
  Top Layer w0.5: XP1.1 XP1.2 5.105,48.938 ccw(c7.303,47.124) 4.49,47.58 XP7.4 XP7.3 XP7.2 XP7.1 2.8,26.66 17.458,3.041 ccw(c18.52,3.7) 18.52,2.45 23.6,2.45 ccw(c23.6,3.7) 24.117,2.562 25.74,3.3 XP3.1 XP5.2 62.851,2.479 ccw(c63.47,3.2) 63.436,2.251 93.878,1.159 ccw(c93.98,4.007) 94.101,1.16 115.11,2.051 ccw(c115.04,3.7) 116.071,2.412 117.18,3.3 XP2.1
  Bottom Layer w0.4: XP2.1 117.748,3.868 ccw(c116.899,4.716) 118.062,4.418 v1(124.53,29.604)
VON: C9.1 DA1.1 DA1.3 HL1.1 HL2.1 HL3.1 HL4.1 R5.1 R7.1 VT1.S VT4.D XP10.2 | length 91.6
  Top Layer w0.2: R5.1 107.6,26.55 108.322,36.948 cw(c109.02,36.9) 108.338,37.056 108.818,39.156 cw(c109.5,39) 108.95,39.433 114.191,46.088 cw(c114.525,45.825) 114.486,46.248 116.15,46.4 DA1.3 116.55,46.4 116.795,46.125 ccw(c117.075,46.375) 117.075,46 117.525,46 ccw(c117.525,46.375) 117.805,46.125 118.05,46.4 DA1.1 ; HL1.1 HL2.1 HL3.1 HL4.1 120.175,73.875 132.218,49.122 cw(c131.5,48.77) 132.3,48.77 132.3,47.77 cw(c131.5,47.77) 132.146,47.298 XP10.2 ; R7.1 123.251,41.3 ccw(c123.251,41.9) 123.746,41.561 124.388,42.5 VT1.S@124.538,42.95
  Top Layer w0.3: DA1.1 118.4,46.45 120.117,46.298 cw(c120.075,45.825) 120.378,46.191 120.85,45.8 C9.1 121.35,45.8 123.118,45.8 123.268,45.95 123.3,45.5 123.3,44.5 ; VT1.S@124.538,42.95 124.544,43.4 124.544,44.5 124.544,45.5 VT4.D@124.538,45.95 ; VT1.S@125.808,42.95 125.828,43.4 125.828,44.5 125.828,45.5 VT4.D@125.808,45.95 ; VT1.S@127.078,42.95 127.083,43.4 127.083,44.5 127.083,45.5 VT4.D@127.078,45.95
  Top Layer w0.5: 123.3,44.5 124.544,44.5 125.828,44.5 127.083,44.5 128.5,44.5 ccw(c128.497,46) 129.256,44.706 XP10.2
pads on no net: DA2.1 DD1.2 DD1.3 DD1.4 DD1.5 DD1.6 DD1.11 DD1.12 DD1.15 DD1.16 DD1.17 DD1.18 DD1.19 DD1.21 DD1.25 DD1.28 DD1.29 DD1.32 G1.TH G2.TH XP1.15

## Polygon pours and split planes (outlines as drawn)
GND on Bottom Layer "GND_L02_P002" (solid, remove dead copper, pour order 2): 0,0 0,75 140,75 140,0
GND on Top Layer "GND_L01_P000" (solid, remove dead copper, pour order 0): 0,0 0,75 140,75 140,0

## Silkscreen, mask and mechanical layers (free items; w line width, h text height)
Top Overlay:
  text "SOC" at 113.637,66.55 h2
  text "Push Counter" at 44.25,63.839 h8
  text "CHARGER" at 93.2,60.05 h2
  text "COUNTER" at 4.4,57.95 h2
  text "PWR" at 133.95,44.4 h2 r90
  text "BOOT" at 108.625,39.95 h2
  text "LED_IND" at 8.45,25.8 h2 r90
  text "_" at 4.319,24.26 h3
  text "+" at 1.319,23.96 h2
  text "UART" at 131.65,21.25 h2 r90
  text "DEBUGGER" at 138.95,20 h2 r90
  text "+ + + + + + + + + + + + +" at 102.875,15 h5 r90
  text "LOAD_CELL" at 17.2,5.15 h2
  text "BEEP" at 60.137,5.15 h2
  text "LOAD_CELL" at 108.6,5.15 h2
Board:
  lines w0.2: 0,0 140,0 140,41.881 cw(c140.117,45.812) 136.185,45.929 cw(c140.148,46.077) 140,50.04 140,75 139.755,75 0,75 0,0